# Altium PCB 0.PcbDoc
Units mil, origin at the board's own origin, x right, y up, seen from the top; angles counter-clockwise.
Board outline 2362.2 x 1889.76 mil, 2 copper layers (Top Layer, Bottom Layer); 15 components, 30 nets, 118 pads, 25 vias.
Unrouted connection lines stored in the file: 33.
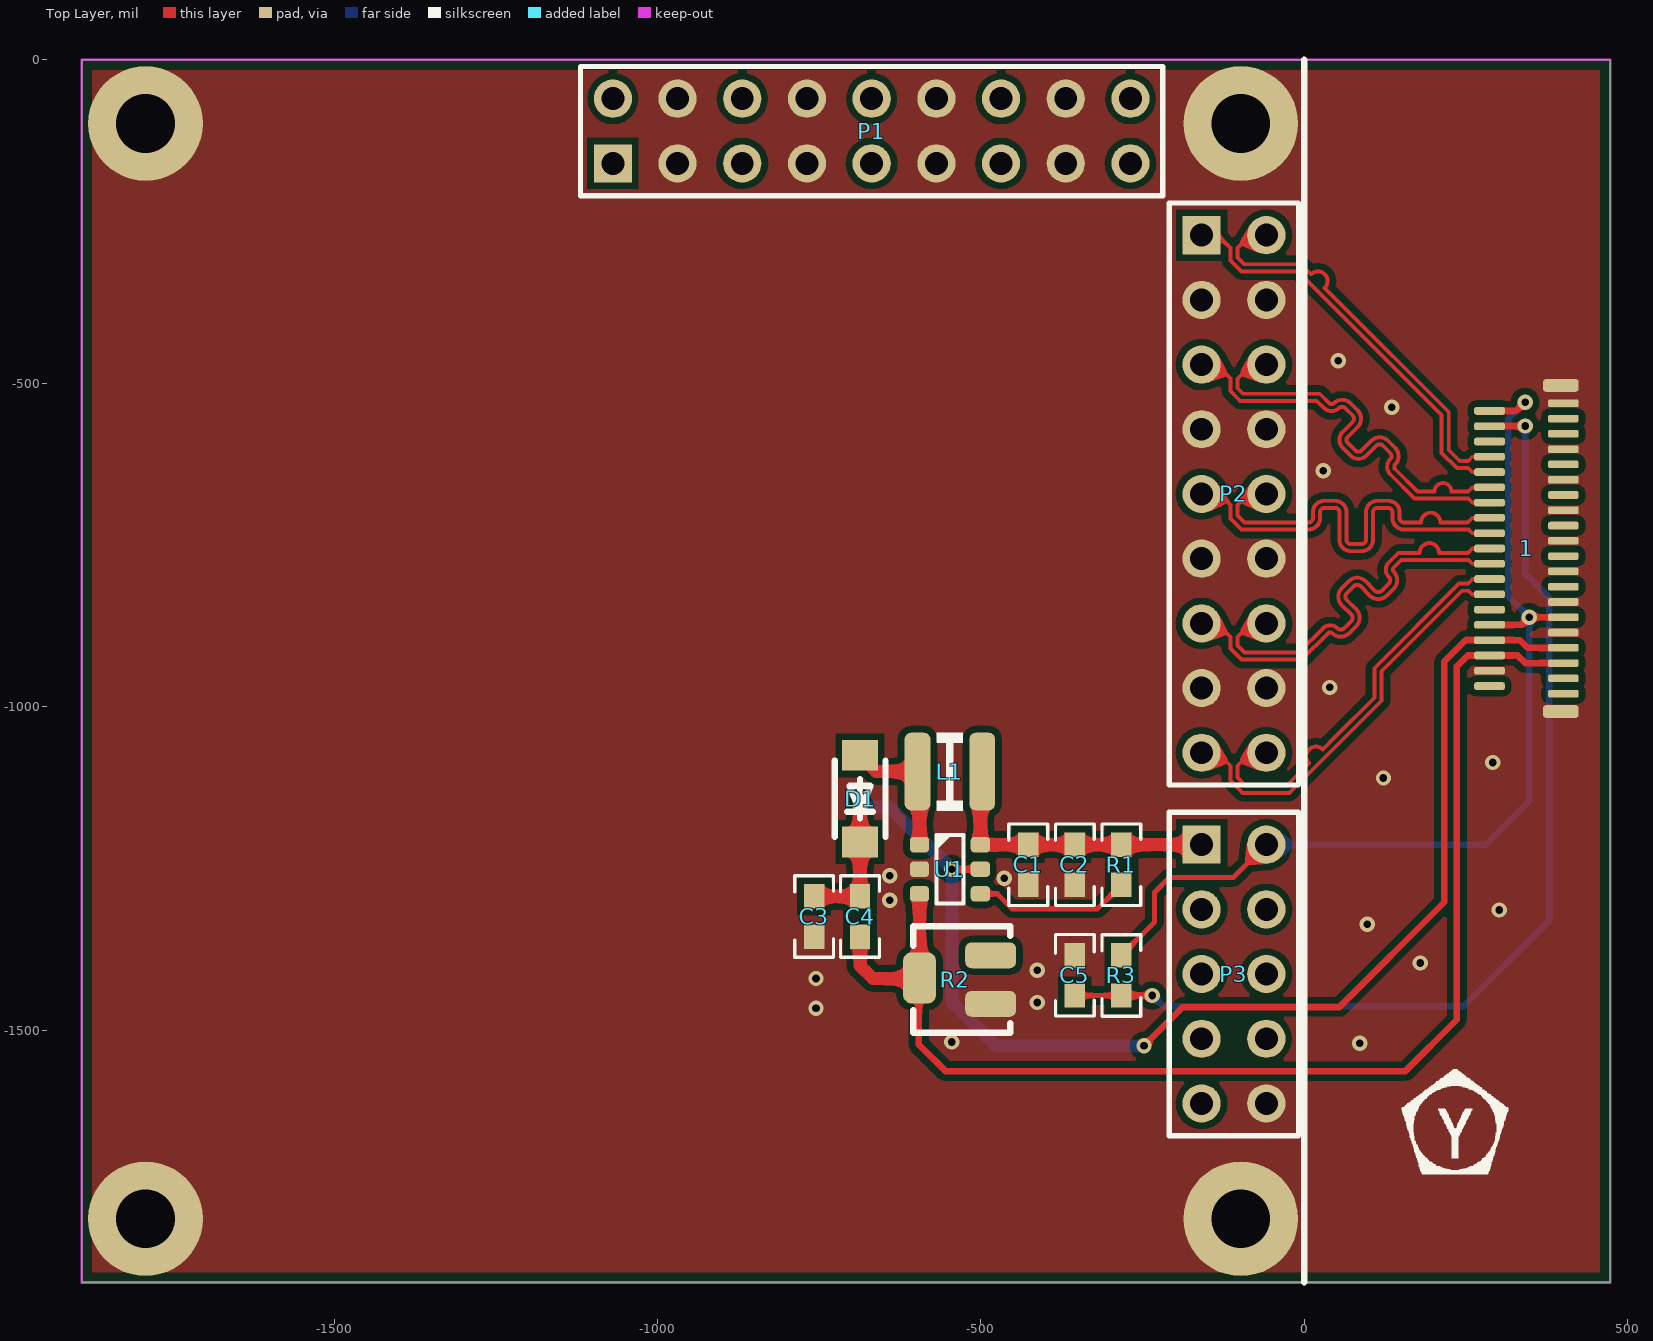
[diagram p0: Top Layer view]
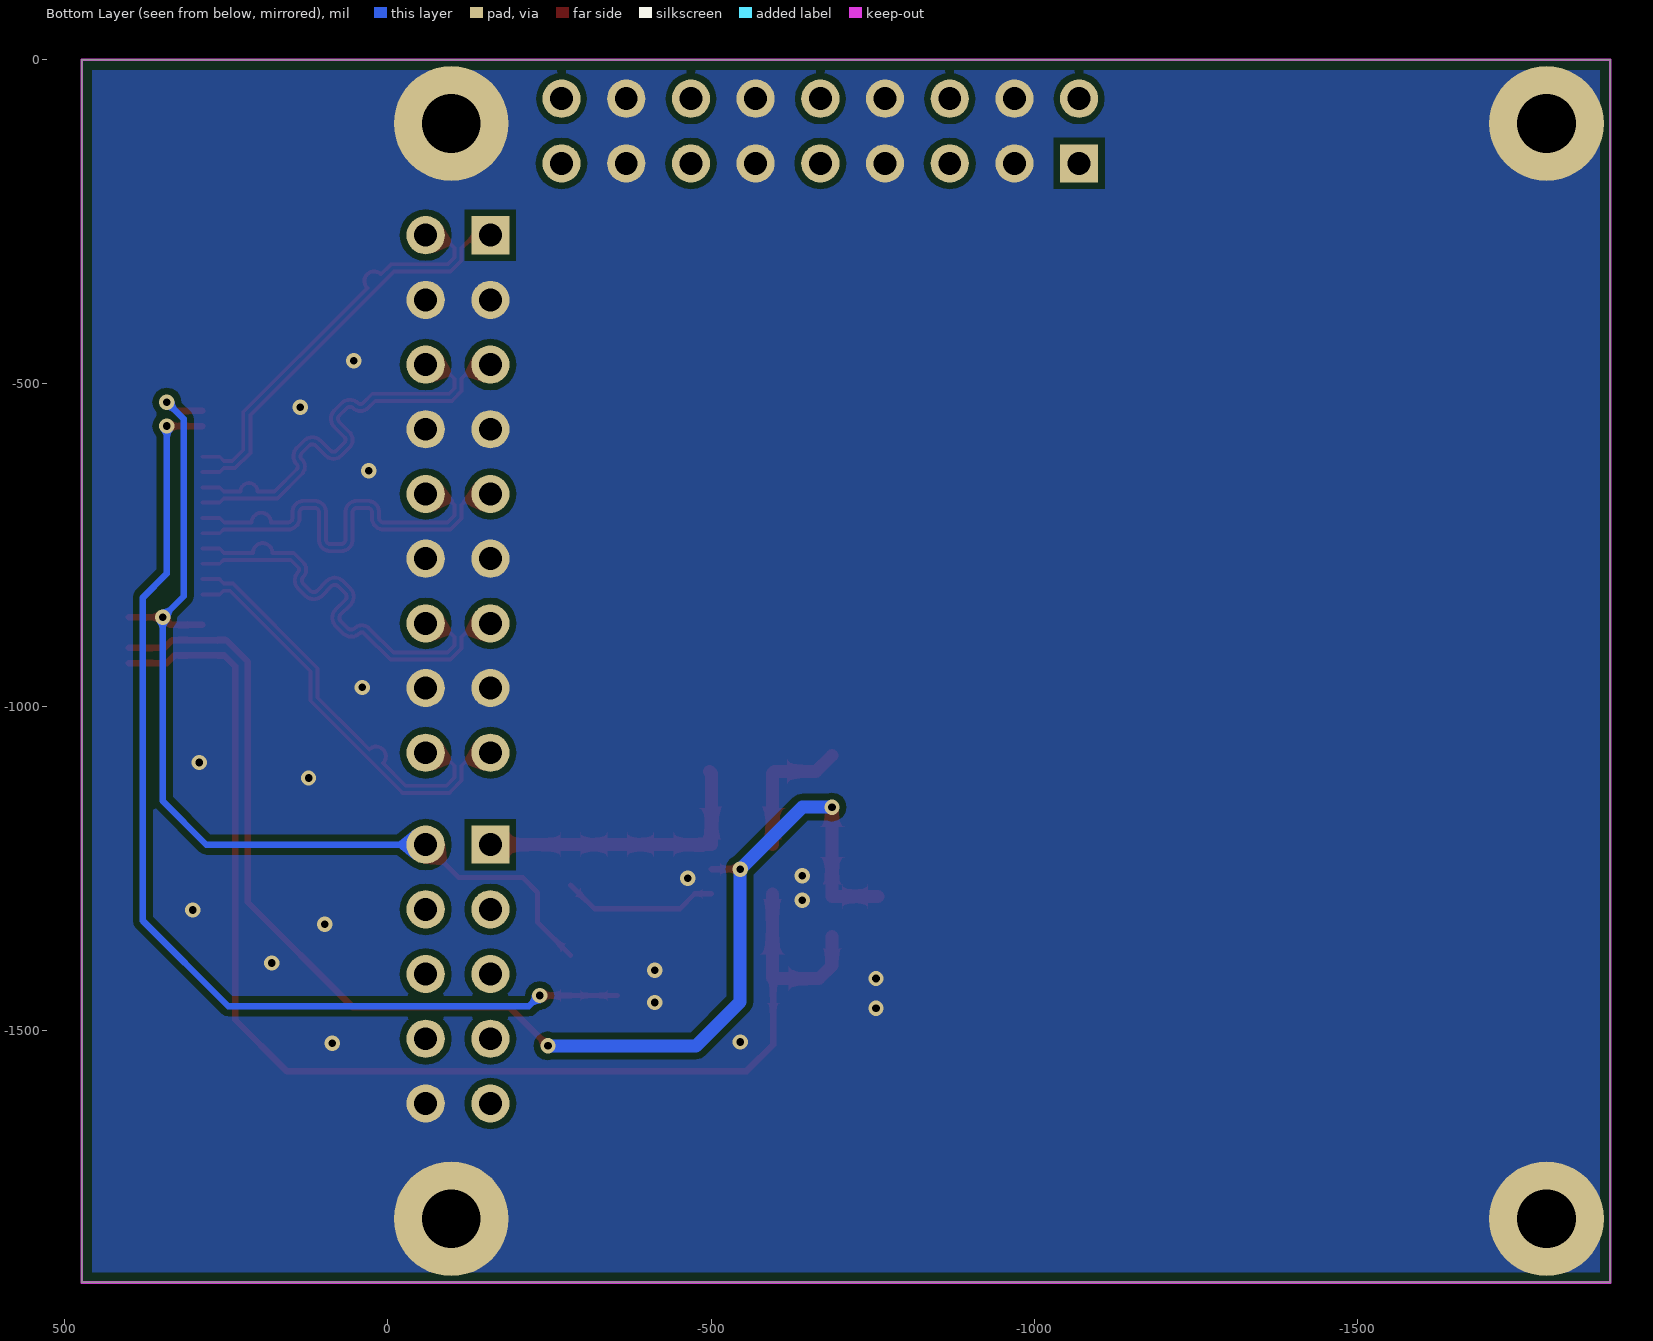
[diagram p1: Bottom Layer view, seen from below]
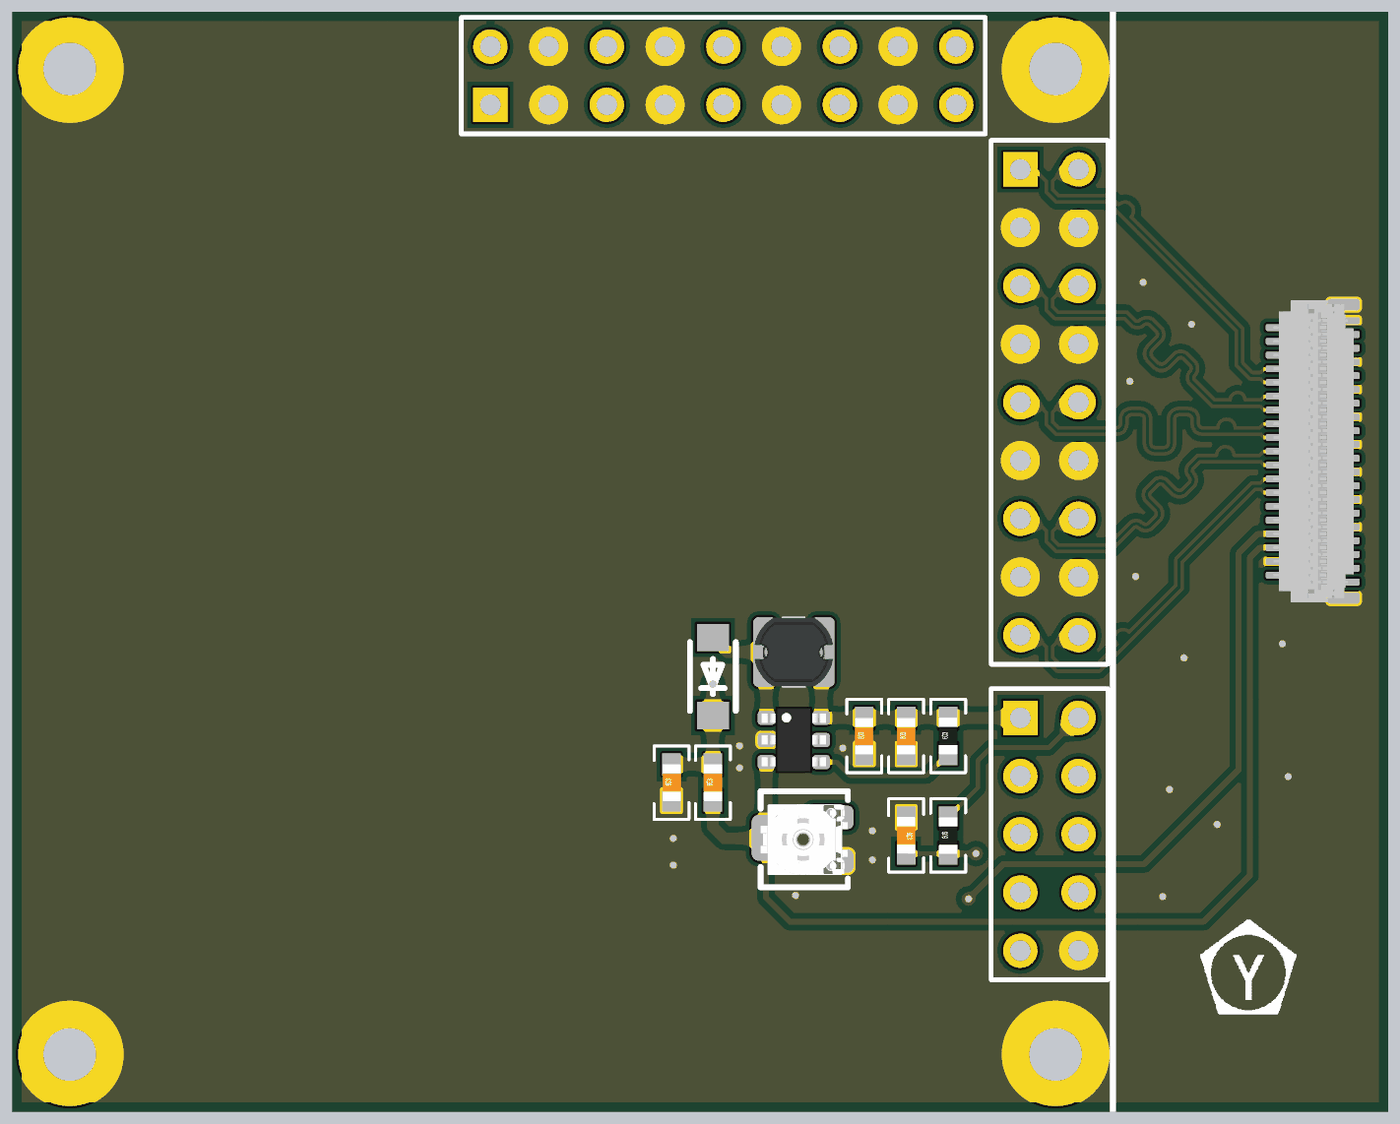
[diagram p2: 3D render of the assembled board from above, using the file's embedded part models]
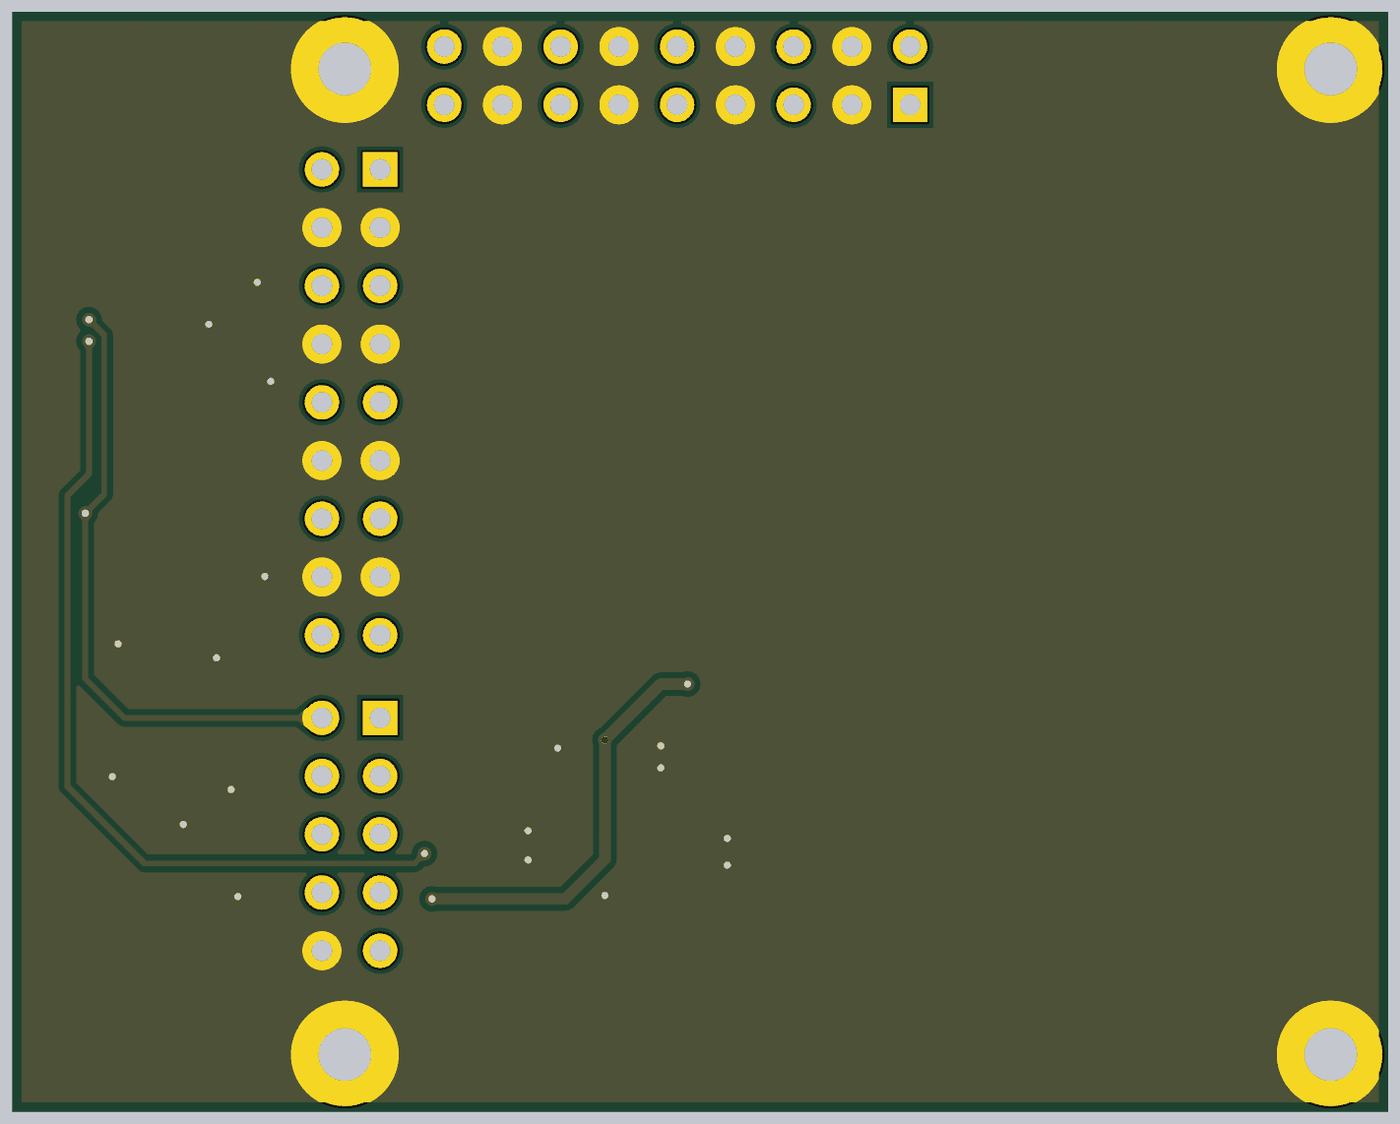
[diagram p3: 3D render of the assembled board from below, using the file's embedded part models]

## Layer stack, top to bottom
Top Solder: solder mask 0.4, Solder Resist, Dk 3.5
Top Layer: signal copper 1.4
Dielectric 1: dielectric 12.6, FR-4, Dk 4.8
Bottom Layer: signal copper 1.4
Bottom Solder: solder mask 0.4, Solder Resist, Dk 3.5

## Board outline
-1889.76,-1889.76 -1889.76,0 472.44,0 472.44,-1889.76

## Design rules (kind name [scope] priority, off if disabled: settings)
BoardOutlineClearance [All] p1: gap=15.75 ignorepadtopadclearanceinfootprint=FALSE
Clearance Clearance_2 [InNamedPolygon('GND_L02_P001') Or  InNamedPolygon('GND_L01_P000')] p1: gap=10 ignorepadtopadclearanceinfootprint=FALSE except(0: Arc-Hole Track-Hole SMDPad-Hole THPad-Hole Via-Hole Fill-Hole Poly-Hole Region-Hole Text-Hole)
Clearance Clearance_1 [(InDifferentialPairClass('All Differential Pairs')) vs InNamedPolygon('GND_L01_P000')] p2: gap=18 ignorepadtopadclearanceinfootprint=FALSE
Clearance [All] p3: gap=5 ignorepadtopadclearanceinfootprint=FALSE
ComponentClearance [All] p1: gap=0 collisioncheckmode=3 verticalgap=0 showdistances=FALSE
DiffPairsRouting MIPI_DiffPairsRouting [InDifferentialPair ('MIPI0_D1') Or InDifferentialPair ('MIPI0_D2') Or InDifferentialPair ('MIPI0_DC') Or InDifferentialPair ('MIPI0_D3') Or InDifferentialPair ('MIPI0_D0')] p1: maxlimit=5 minlimit=5 mostfreqgap=5 toplayer_minwidth=6 toplayer_maxwidth=6 toplayer_prefwidth=6 bottomlayer_minwidth=6 bottomlayer_maxwidth=6 bottomlayer_prefwidth=6 maxuncoupledlength=500
DiffPairsRouting [All] p2: maxlimit=5 minlimit=5 mostfreqgap=5 toplayer_minwidth=6 toplayer_maxwidth=6 toplayer_prefwidth=6 bottomlayer_minwidth=6 bottomlayer_maxwidth=6 bottomlayer_prefwidth=6 maxuncoupledlength=500
MatchedLengths MIPI_MatchedLengths [InDifferentialPair ('MIPI0_D1') Or InDifferentialPair ('MIPI0_D2') Or InDifferentialPair ('MIPI0_DC') Or InDifferentialPair ('MIPI0_D3') Or InDifferentialPair ('MIPI0_D0')] p1: tolerance=10 checknetsindiffpair=FALSE checkdiffpairvsdiffpair=TRUE checkxsignals=TRUE checkothers=TRUE
PolygonConnect [All] p1: connectstyle=Direct reliefconductorwidth=10 reliefentries=4 polygonreliefangle="90 Angle" airgapwidth=10
RoutingVias [All] p1: holewidth=28 width=50 viastyle="Through Hole" minholewidth=28 minwidth=50 maxholewidth=28 maxwidth=50
SolderMaskExpansion [All] p1: expansion=4
Width [All] p1: maxlimit=100 minlimit=5 preferedwidth=6 minimp=50.000000 maximp=50.000000 favimp=50.000000
28 further rules are at their usual default settings.

## Classes and differential pairs
differential pair MIPI0_DC: +MIPI0_DC_P -MIPI0_DC_N
differential pair MIPI0_D3: +MIPI0_D3_P -MIPI0_D3_N
differential pair MIPI0_D2: +MIPI0_D2_P -MIPI0_D2_N
differential pair MIPI0_D1: +MIPI0_D1_P -MIPI0_D1_N
differential pair MIPI0_D0: +MIPI0_D0_P -MIPI0_D0_N

## Components (designator, comment, footprint, x,y, rotation, side; value= is the part's Value field where it differs from the comment)
1 "FH26-39S-0.3SHW" FH26-39S-0.3SHW 286,-755.24 r90 bottom
C1 "10uF" 0603_CAP -427,-1244.1 r90 top value=0.1u
C2 "0.1uF" 0603_CAP -355,-1244.1 r90 top value=0.1u
C3 "10uF" 0603_CAP -758,-1324.1 r90 top value=0.1u
C4 "0.1uF" 0603_CAP -687,-1324.1 r90 top value=0.1u
C5 "10uF" 0603_CAP -355,-1415.1 r270 top value=0.1u
D1 "RSX501L-20" SOD-123F_L2.8-W1.8-LS3.7-RD -687,-1142 r90 top
L1 "CD32" IND_CD32 -548,-1100 r180 bottom value=22uH
P1 "Header 9X2" HDR2X9 -1069,-160 r0 top
P2 "Header 9X2" HDR2X9 -159,-271 r270 top
P3 "Header 5X2" HDR2X5 -159,-1213 r270 top
R1 "33K" 0603_RES -283,-1244.1 r90 top value=22R
R2 "电位器-贴片" "贴片电位器 3*3" -555,-1414 r180 bottom
R3 "10K" 0603_RES -283,-1415.1 r90 top value=22R
U1 "RT9293" SOT23-6 -548,-1251 r0 top

## Footprints (in the part's own frame and the unit in brackets; to place one, negate y for a bottom-side part, rotate by r counter-clockwise, add the part's x,y. Pads: shape width x height; smd on the part's side, far side on the other; paste and mask are expansions set on the pad)
0603_CAP [mm]
  rect 0.96x0.8 smd: 1(-0.79,0) 2(0.79,0)
  silkscreen extent -1.6,-0.76 1.6,0.76, body extent -0.81,-0.4 0.79,0.4, height 0.3
0603_RES [mm]
  rect 0.96x0.8 smd: 1(-0.79,0) 2(0.79,0)
  silkscreen extent -1.6,-0.76 1.6,0.76, body extent -0.8,-0.4 0.8,0.4, height 0.3
FH26-39S-0.3SHW [mm]
  rrect50% 0.3x1.2 smd far side: 1(5.7,2.9) 2(5.4,0) 3(5.1,2.9) 4(4.8,0) 5(4.5,2.9) 6(4.2,0) 7(3.9,2.9) 8(3.6,0) 9(3.3,2.9) 10(3,0) 11(2.7,2.9) 12(2.4,0) 13(2.1,2.9) 14(1.8,0) 15(1.5,2.9) 16(1.2,0) 17(0.9,2.9) 18(0.6,0) 19(0.3,2.9) 20(0,0) 21(-0.3,2.9) 22(-0.6,0) 23(-0.9,2.9) 24(-1.2,0) 25(-1.5,2.9) 26(-1.8,0) 27(-2.1,2.9) 28(-2.4,0) 29(-2.7,2.9) 30(-3,0) 31(-3.3,2.9) 32(-3.6,0) 33(-3.9,2.9) 34(-4.2,0) 35(-4.5,2.9) 36(-4.8,0) 37(-5.1,2.9) 38(-5.4,0) 39(-5.7,2.9)
  rrect50% 0.5x1.4 smd far side: GND1(6.4,2.8) GND2(-6.4,2.8)
  body extent -6.6,-0.27 6.6,3.23, height 0.98
HDR2X5 [mm] "Connector; Header; 5x2 Position"
  rect 1.5x1.5 hole 0.9: 1(0,0)
  round 1.5 hole 0.9: 2(0,2.54) 3(2.54,0) 4(2.54,2.54) 5(5.08,0) 6(5.08,2.54) 7(7.62,0) 8(7.62,2.54) 9(10.16,0) 10(10.16,2.54)
  silkscreen extent -1.27,-1.27 11.43,3.81
HDR2X9 [mm] "Connector; Header; 9x2 Position"
  rect 1.5x1.5 hole 0.9: 1(0,0)
  round 1.5 hole 0.9: 2(0,2.54) 3(2.54,0) 4(2.54,2.54) 5(5.08,0) 6(5.08,2.54) 7(7.62,0) 8(7.62,2.54) 9(10.16,0) 10(10.16,2.54) 11(12.7,0) 12(12.7,2.54) 13(15.24,0) 14(15.24,2.54) 15(17.78,0) 16(17.78,2.54) 17(20.32,0) 18(20.32,2.54)
  silkscreen extent -1.27,-1.27 21.59,3.81
IND_CD32 [mil]
  rrect50% 40x120 smd far side: 1(-50,0) 2(50,0)
  body extent -68,-59 68,59, height 83
SOD-123F_L2.8-W1.8-LS3.7-RD [mm]
  rect 1.2x1.4 smd: 1(-1.7,0) 2(1.7,0)
  silkscreen extent -1.5,-1 1.5,1
SOT23-6 [mil]
  rrect50% 30x24 smd: 1(-47,38) 2(-47,0) 3(-47,-38) 4(47,-38) 5(47,0) 6(47,38)
  silkscreen extent -21,-53 21,53, body extent -55,-57 55,57, height 57
"贴片电位器 3*3" [mil]
  rrect50% 78.74x40.18 smd far side: 1(-70,-45) 2(-70,30)
  rrect50% 50.74x78.74 smd far side: 3(40,-5)
  body extent -100,-69 50,53, height 64

## Part data
1: "39 Position FPC Connector Contacts, Bottom 0.012 _0.30mm_ Surface Mount, Right Angle", Package=None, Availability=Unavailable, MF=Hirose, MP=FH26-39S-0.3SHW, Price=None, SnapEDA_Link=https://www.snapeda.com/parts/FH26-39S-0.3SHW/Hirose/view-part/44187/?ref=snap
C1 C2 C3 C4 C5: library part 电容-0402, "Capacitor"
D1: "Diode Schottky 40V 1A Surface Mount SMA _DO-214AC_", Package="DO-214AC-214 ON Semiconductor", Availability=Unavailable, MF="ON Semiconductor", MP=SS14, Price=None, SnapEDA_Link=https://www.snapeda.com/parts/SS14/ON%20Semiconductor/view-part/1413348/?ref=snap
L1: library part Ind_CD32, "Inductor", Specification="±5% 100mA", Type=CD32
P1 P2: "Header, 9-Pin, Dual row", LatestRevisionDate=17-Jul-2002, LatestRevisionNote="Re-released for DXP Platform.", Publisher="Altium Limited"
P3: "Header, 5-Pin, Dual row", LatestRevisionDate=17-Jul-2002, LatestRevisionNote="Re-released for DXP Platform.", Publisher="Altium Limited"
R1 R3: library part 电阻-0402, "Resistor"
U1: "LCD-LED Driver"
R2: ComponentLink1Description="Manufacturer Link", ComponentLink1URL=http://bourns.com/2/search.html, DatasheetVersion=Oct-2003, PackageDescription="Square Trimming Potentiometer", PackageReference=POT4MM-2, Published=17-Dec-2003, Publisher="Altium Limited"

## Free pads (board coordinates)
  round 177.17 hole 90.55: 30(-1791.34,-1791.34) 30(-1791.34,-98.43) 30(-98.43,-1791.34) 30(-98.43,-98.43)

## Via types
v1: diameter 23.62, hole 11.81, Top Layer to Bottom Layer, tented both sides, 25 vias

## Nets (pads, with @x,y where several pads share a name; then routed paths per layer and width w, separated by ;. In a path a pad name is that pad's centre, name@x,y a point inside that pad or via, vN(x,y) a via of type N, cw(c..) or ccw(c..) an arc to the next point about the centre after c; other vN are vias at no path point)
GND: 1.1 1.7 1.11 1.15 1.19 1.23 1.27 1.31 1.36 1.GND1 1.GND2 C1.1 C2.1 C3.1 C5.1 P1.3 P1.4 P1.7 P1.8 P1.11 P1.12 P1.15 P1.16 P2.3 P2.4 P2.7 P2.8 P2.11 P2.12 P2.15 P2.16 P3.10 pad.30 R2.1 U1.2
  other v1: 85.46,-1520 -545,-1518 -755,-1466 -413,-1457 -755,-1420 -413,-1407 179,-1396 97,-1336 301,-1314 -641,-1299 -464,-1265 -641,-1261 122,-1110 291,-1086 39,-970 29,-635 135,-537 52,-465
MIPI0_D0_N: 1.26 P2.17 | length 642.6
  Top Layer w6: P2.17 -134.5,-1071 -114.5,-1091 -114.5,-1114.06 -98.78,-1129.78 -95.56,-1133 -23.44,-1133 -20.22,-1129.78 119,-990.56 119,-945 243.5,-820.5 253.77,-820.5 259.38,-826.11 1.26
MIPI0_D0_P: 1.24 P2.18 | length 642.5
  Top Layer w6: P2.18 -83.5,-1071 -103.5,-1091 -103.5,-1109.5 -91,-1122 -28,-1122 7,-1087 cw(c17.61,-1076.39) 28.21,-1065.79 46.5,-1047.5 108,-986 108,-940.44 238.94,-809.5 253.07,-809.5 259.38,-803.19 259.38,-802.49 1.24
MIPI0_D1_N: 1.22 P2.13 | length 642.2
  Top Layer w6: P2.13 -135.5,-871 -114.5,-892 -114.5,-910.06 -99.78,-924.78 -97.56,-927 -4.44,-927 36.12,-886.44 cw(c39.8,-890.11) 43.47,-886.44 ccw(c56.06,-873.85) 68.65,-886.44 80.25,-874.83 ccw(c67.66,-862.25) 85.46,-862.25 ccw(c67.66,-862.25) 80.24,-849.67 65.11,-834.53 cw(c69.92,-829.73) 65.11,-824.92 76.71,-813.32 cw(c81.52,-818.13) 86.33,-813.32 101.46,-828.46 ccw(c114.04,-815.87) 126.63,-828.45 138.23,-816.86 ccw(c125.64,-804.27) 143.44,-804.27 ccw(c125.64,-804.27) 138.23,-791.68 cw(c141.9,-788.01) 138.23,-784.33 149.56,-773 253.51,-773 259.38,-778.87 1.22
MIPI0_D1_P: 1.20 P2.14 | length 641.4
  Top Layer w6: P2.14 -82.5,-871 -103.5,-892 -103.5,-905.5 -93,-916 -9,-916 28.34,-878.66 cw(c39.8,-890.11) 51.25,-878.66 ccw(c56.06,-873.85) 60.87,-878.66 72.47,-867.06 ccw(c67.66,-862.25) 74.46,-862.25 ccw(c67.66,-862.25) 72.47,-857.44 57.33,-842.31 cw(c69.92,-829.73) 57.33,-817.14 68.94,-805.54 cw(c81.52,-818.13) 94.1,-805.54 109.24,-820.67 ccw(c114.04,-815.87) 118.85,-820.67 130.45,-809.08 ccw(c125.64,-804.27) 132.44,-804.27 ccw(c125.64,-804.27) 130.45,-799.46 cw(c141.9,-788.01) 130.45,-776.55 145,-762 178,-762 cw(c193,-762) 208,-762 238,-762 252.62,-762 259.38,-755.24 1.20
MIPI0_D2_N: 1.14 P2.5 | length 642.5
  Top Layer w6: P2.5 -136,-471 -114.5,-492.5 -114.5,-512.06 -102.78,-523.78 -99.56,-527 19,-527 30.26,-538.26 ccw(c41.78,-526.73) 53.31,-538.26 cw(c58.12,-543.07) 62.93,-538.26 74.52,-549.85 cw(c69.72,-554.66) 76.52,-554.66 cw(c69.72,-554.66) 74.52,-559.47 59.25,-574.75 ccw(c71.84,-587.33) 59.25,-599.92 70.85,-611.52 ccw(c83.43,-598.93) 96.02,-611.51 111.29,-596.24 cw(c116.1,-601.05) 120.91,-596.24 132.51,-607.84 cw(c127.7,-612.65) 134.5,-612.65 cw(c127.7,-612.65) 132.51,-617.45 ccw(c144.03,-628.98) 132.51,-640.51 170.07,-678.07 253.07,-678.07 259.38,-684.38 1.14
MIPI0_D2_P: 1.12 P2.6 | length 638.9
  Top Layer w6: P2.6 -81.56,-471 -103.5,-492.94 -103.5,-507.5 -95,-516 23.56,-516 38.04,-530.48 ccw(c41.78,-526.73) 45.53,-530.48 cw(c58.12,-543.07) 70.71,-530.48 82.3,-542.08 cw(c69.72,-554.66) 87.52,-554.66 cw(c69.72,-554.66) 82.3,-567.25 67.03,-582.52 ccw(c71.84,-587.33) 67.03,-592.14 78.62,-603.74 ccw(c83.43,-598.93) 88.24,-603.74 103.52,-588.46 cw(c116.1,-601.05) 128.69,-588.46 140.28,-600.06 cw(c127.7,-612.65) 145.5,-612.65 cw(c127.7,-612.65) 140.28,-625.23 ccw(c144.03,-628.98) 140.28,-632.73 174.62,-667.07 175.07,-667.07 201.07,-667.07 cw(c214.07,-667.07) 227.07,-667.07 253.07,-667.07 259.38,-660.76 1.12
MIPI0_D3_N: 1.10 P2.1 | length 642
  Top Layer w6: P2.1 -134.5,-271 -114.5,-291 -114.5,-310.06 -97.56,-327 -10,-327 212,-549 212,-607.38 235.44,-630.82 253.07,-630.82 259.38,-637.13 1.10
MIPI0_D3_P: 1.8 P2.2 | length 640.9
  Top Layer w6: P2.2 -83.5,-271 -103.5,-291 -103.5,-305.5 -93,-316 -5.44,-316 10,-331.44 cw(c20.61,-342.05) 31.21,-352.66 50.56,-372 223,-544.44 223,-602.82 240,-619.82 253.07,-619.82 259.38,-613.51 1.8
MIPI0_DC_N: 1.18 P2.9 | length 641.2
  Top Layer w6: P2.9 -131.5,-671 -114.5,-688 -114.5,-709.06 -97.56,-726 6.2,-726 ccw(c6.2,-708.2) 24,-708.2 24,-699.3 cw(c30.8,-699.3) 30.8,-692.5 47.2,-692.5 cw(c47.2,-699.3) 54,-699.3 54,-741.7 ccw(c71.8,-741.7) 71.8,-759.5 88.2,-759.5 ccw(c88.2,-741.7) 106,-741.7 106,-699.3 cw(c112.8,-699.3) 112.8,-692.5 129.2,-692.5 cw(c129.2,-699.3) 136,-699.3 136,-708.2 ccw(c153.8,-708.2) 153.8,-726 253.76,-726 259.38,-731.62 1.18
MIPI0_DC_P: 1.16 P2.10 | length 640.7
  Top Layer w6: P2.10 -86.5,-671 -103.5,-688 -103.5,-704.5 -93,-715 6.2,-715 ccw(c6.2,-708.2) 13,-708.2 13,-699.3 cw(c30.8,-699.3) 30.8,-681.5 47.2,-681.5 cw(c47.2,-699.3) 65,-699.3 65,-741.7 ccw(c71.8,-741.7) 71.8,-748.5 88.2,-748.5 ccw(c88.2,-741.7) 95,-741.7 95,-699.3 cw(c112.8,-699.3) 112.8,-681.5 129.2,-681.5 cw(c129.2,-699.3) 147,-699.3 147,-708.2 ccw(c153.8,-708.2) 153.8,-715 180,-715 cw(c195,-715) 210,-715 240,-715 252.38,-715 259.38,-708 1.16
NetD1_2: D1.2 L1.2 U1.1 | length 213.6
  Top Layer w20: D1.2 -662.07,-1100 L1.2 -595,-1103 U1.1
NetP1_1: P1.1
NetP1_2: P1.2
NetP1_5: P1.5
NetP1_6: P1.6
NetP1_9: P1.9
NetP1_10: P1.10
NetP1_13: P1.13
NetP1_14: P1.14
NetP1_17: P1.17
NetP1_18: P1.18
NetR1_1: R1.1 U1.4 | length 242.8
  Top Layer w8: U1.4 -475,-1289 -452,-1312 -319.8,-1312 R1.1
RST: 1.4 C5.2 R3.1 | length 1630.4
  Top Layer w8: C5.2 R3.1
  Top Layer w10: R3.1 v1(-235.2,-1446.2) v1@-235,-1446 ; 1.4 340.79,-566.27 v1(341.06,-566)
  Bottom Layer w10: v1(-235.2,-1446.2) -218.41,-1463 246,-1463 378,-1331 378,-831 341.06,-794.06 v1(341.06,-566)
VCC_1V1: P3.4
VCC_1V8: P3.3
VCC_3V3: 1.2 1.29 1.30 P3.2 R3.2 | length 1576.7
  Top Layer w8: R3.2 -232,-1333 -232,-1287 -209,-1264 -110,-1264 P3.2
  Top Layer w10: 1.30 335.65,-873.35 v1(347.46,-861.54) 1.29 ; 1.2 327.41,-542.65 v1(341.06,-529)
  Bottom Layer w10: P3.2 280,-1213 347.46,-1145.54 v1(347.46,-861.54) 315,-829.09 315,-555.06 v1(341.06,-529)
VLED+: 1.32 1.33 C3.2 C4.2 D1.1 U1.5 | length 2095.8
  Top Layer w10: v1(-545,-1251) U1.5 ; v1(-248,-1524) -188,-1464 54,-1464 216,-1302 216,-930 249.02,-896.98 1.32 332.98,-896.98 345,-909 399.96,-909 1.33
  Top Layer w20: C3.2 C4.2 D1.1 v1(-687,-1155)
  Bottom Layer w20: v1(-687,-1155) -641,-1155 v1(-545,-1251) -545,-1456 -477,-1524 v1(-248,-1524)
VLED-: 1.34 1.35 C4.1 R2.3 U1.3 | length 1981.5
  Top Layer w10: R2.3@-596,-1420 -596,-1522 -555,-1563 156,-1563 235.44,-1483.56 235.44,-937.56 252.4,-920.6 1.34 329.24,-920.6 341.06,-932.41 1.35
  Top Layer w20: C4.1 -687,-1400 -667,-1420 -596,-1420 R2.3 U1.3
VUSB: C1.2 C2.2 L1.1 P3.1 R1.2 U1.6 | length 456.2
  Top Layer w20: L1.1 -501,-1103 U1.6 C1.2 C2.2 R1.2 P3.1
pads on no net: 1.3 1.5 1.6 1.9 1.13 1.17 1.21 1.25 1.28 1.37 1.38 1.39 P3.5 P3.6 P3.7 P3.8 P3.9 R2.2

## Polygon pours and split planes (outlines as drawn)
GND on Top Layer "GND_L01_P000" (solid, remove dead copper, pour order 0): -1889.76,-1889.76 -1889.76,0 472.44,0 472.44,-1889.76
GND on Bottom Layer "GND_L02_P001" (solid, remove dead copper, pour order 1): -1889.76,-1889.76 -1889.76,0 472.44,0 472.44,-1889.76

## Keep-outs
Keep-Out Layer:
  the board outline again, w3.94

## Silkscreen, mask and mechanical layers (free items; w line width, h text height)
Top Overlay:
  drawing of 402 lines, arcs and shapes, not listed